# EAGLE board rpicam_rev2 (EAGLE 7.1.0)
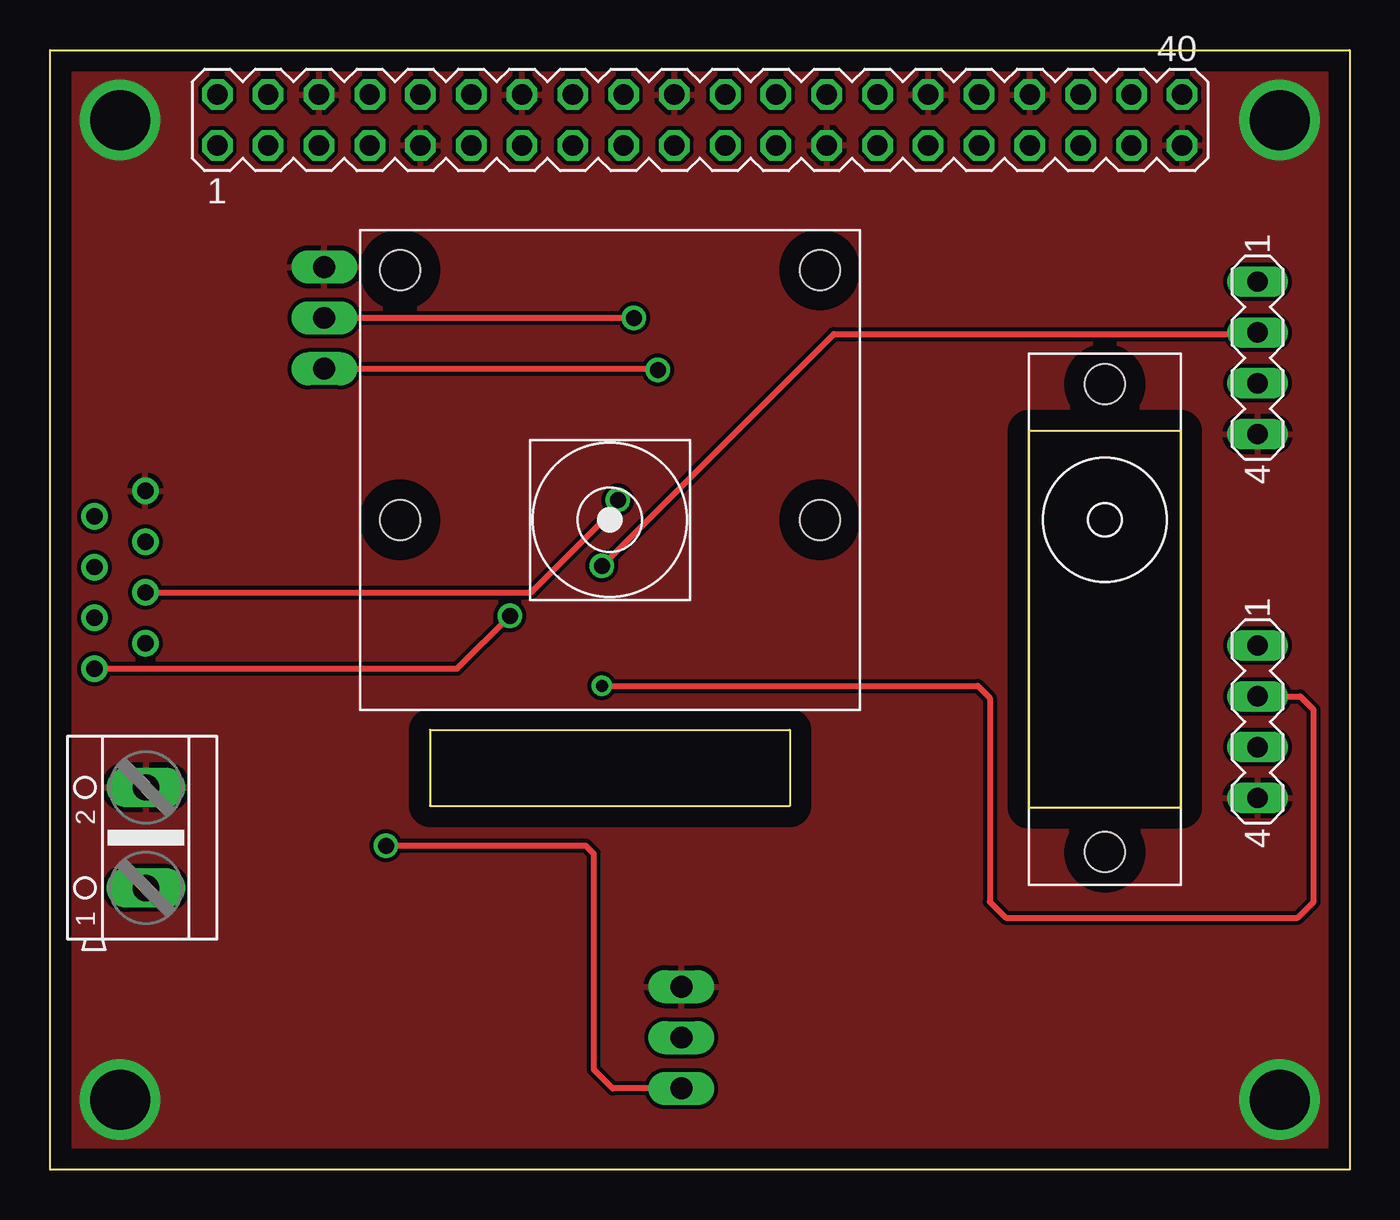
[diagram p0: board, top side]
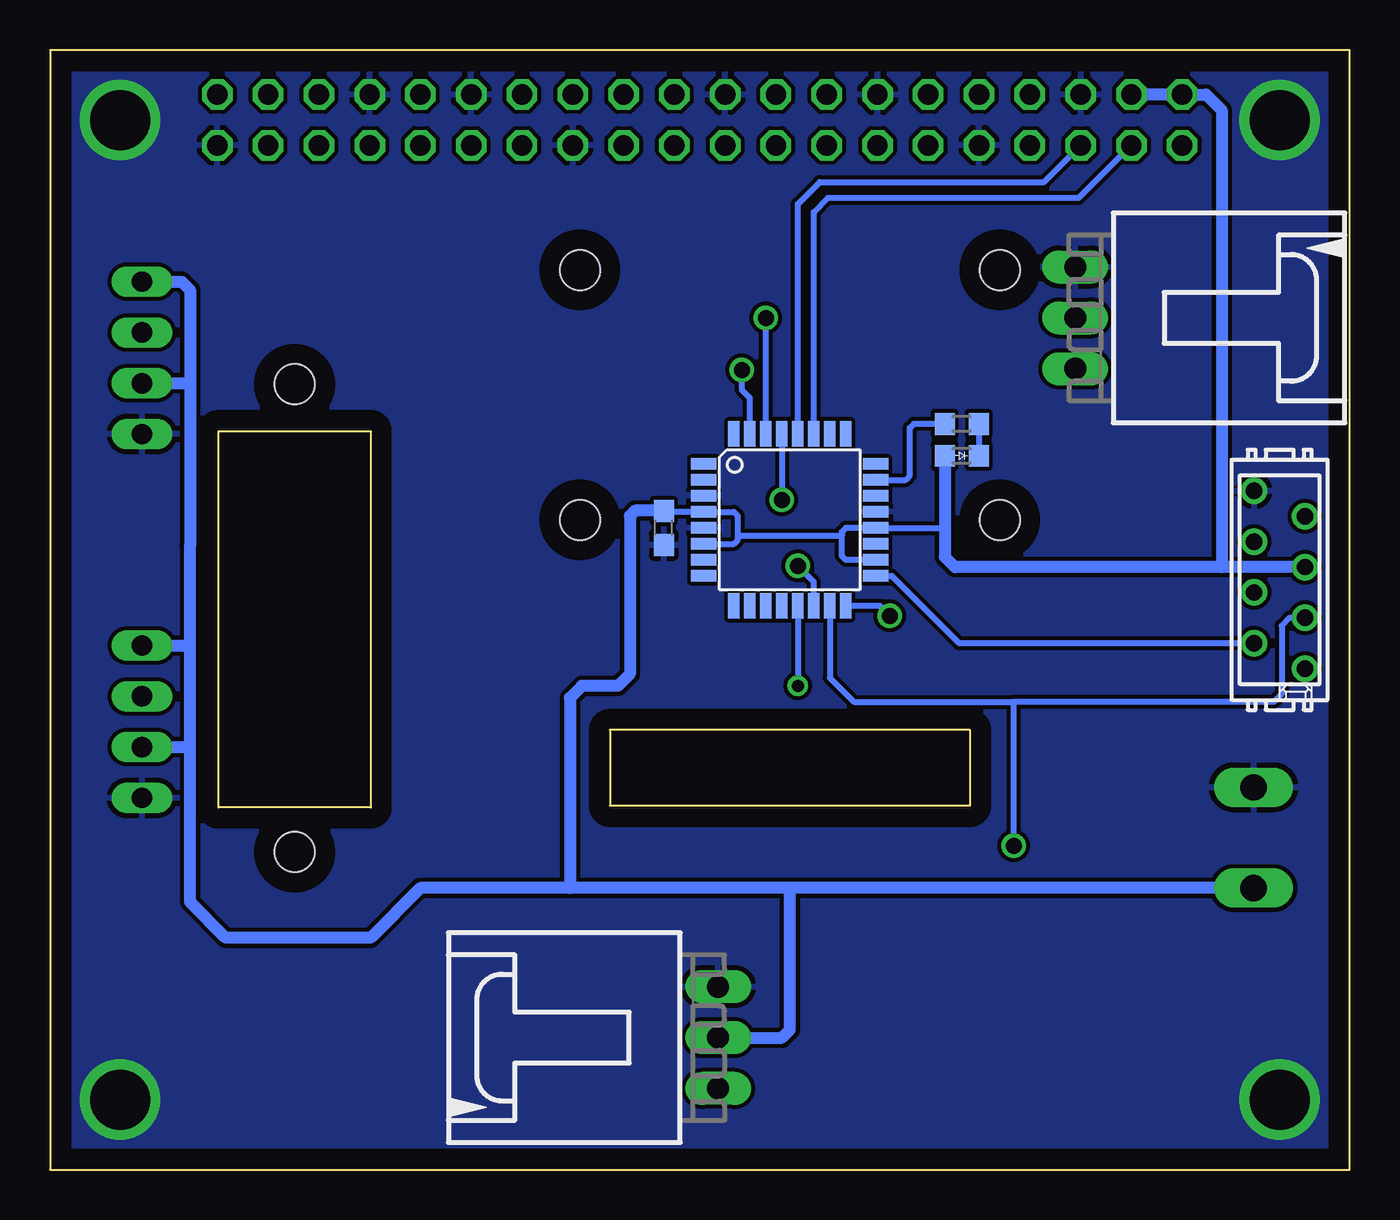
[diagram p1: board, bottom side, seen from below]

Size 65 x 56 mm. Coordinates in mm from the lower left corner, seen from the top.
Outline: 0,56 65,56 65,0 0,0 0,56
Outline: 19,22 19,18.2 37,18.2 37,22 19,22
Copper layers (1*16): Top 0.035mm / dielectric 1.5mm / Bottom 0.035mm
Design rules "default": minimum track width 10mil, minimum drill 24mil, track to track 8mil, track to pad 8mil, pad to pad 8mil, via to via 8mil, smd to smd 8mil, copper to edge 40mil, drill to drill 8mil, minimum pad ring 10mil, minimum via ring 8mil, stop-mask expansion 4mil, vias tented up to drill 0mil, thermal gap 10mil

## Footprints (pad centres in the part's own frame; a part is rotated, then mirrored left to right if it is on the bottom)
C0603 = smd 1.1 x 1: 1 -0.85,0; 2 0.85,0
TQFP32-08 = smd 1.27 x 0.559: 1 -4.293,2.8; 2 -4.293,2; 3 -4.293,1.2; 4 -4.293,0.4; 5 -4.293,-0.4; 6 -4.293,-1.2; 7 -4.293,-2; 8 -4.293,-2.8; 17 4.293,-2.8; 18 4.293,-2; 19 4.293,-1.2; 20 4.293,-0.4; 21 4.293,0.4; 22 4.293,1.2; 23 4.293,2; 24 4.293,2.8 | smd 0.559 x 1.27: 9 -2.8,-4.293; 10 -2,-4.293; 11 -1.2,-4.293; 12 -0.4,-4.293; 13 0.4,-4.293; 14 1.2,-4.293; 15 2,-4.293; 16 2.8,-4.293; 25 2.8,4.293; 26 2,4.293; 27 1.2,4.293; 28 0.4,4.293; 29 -0.4,4.293; 30 -1.2,4.293; 31 -2,4.293; 32 -2.8,4.293
MICROMATCH-8 = drill 0.813: 1 4.445,1.27; 2 3.175,-1.27; 3 1.905,1.27; 4 0.635,-1.27; 5 -0.635,1.27; 6 -1.905,-1.27; 7 -3.175,1.27; 8 -4.445,-1.27
R0603 = smd 1 x 1.1: 1 -0.85,0; 2 0.85,0
MA20-2 = drill 1.016 octagon: 1 -24.13,-1.27; 2 -24.13,1.27; 3 -21.59,-1.27; 4 -21.59,1.27; 5 -19.05,-1.27; 6 -19.05,1.27; 7 -16.51,-1.27; 8 -16.51,1.27; 9 -13.97,-1.27; 10 -13.97,1.27; 11 -11.43,-1.27; 12 -11.43,1.27; 13 -8.89,-1.27; 14 -8.89,1.27; 15 -6.35,-1.27; 16 -6.35,1.27; 17 -3.81,-1.27; 18 -3.81,1.27; 19 -1.27,-1.27; 20 -1.27,1.27; 21 1.27,-1.27; 22 1.27,1.27; 23 3.81,-1.27; 24 3.81,1.27; 25 6.35,-1.27; 26 6.35,1.27; 27 8.89,-1.27; 28 8.89,1.27; 29 11.43,-1.27; 30 11.43,1.27; 31 13.97,-1.27; 32 13.97,1.27; 33 16.51,-1.27; 34 16.51,1.27; 35 19.05,-1.27; 36 19.05,1.27; 37 21.59,-1.27; 38 21.59,1.27; 39 24.13,-1.27; 40 24.13,1.27
MA04-1 = drill 1.016 long: 1 -3.81,0; 2 -1.27,0; 3 1.27,0; 4 3.81,0
D0603 = smd 1 x 1.1: 1 -0.85,0; 2 0.85,0
RPICAM = hole 2: -10.5,0; 10.5,0; -10.5,12.5; 10.5,12.5
HS-35HD = hole 2: 0,-16.62; 0,6.78
70553-03 = drill 1.092 long: 1 -2.54,-7.62; 2 0,-7.62; 3 2.54,-7.62
AK500/2 = drill 1.321 long: 1 -2.515,0; 2 2.515,0

## Placement (x,y rotation side)
C1  [C0603]  34.3,32.1 90 bottom
IC1  MEGA8-AI  [TQFP32-08]  28,32.5 0 bottom
ISP  MICROMATCH-8  [MICROMATCH-8]  3.5,29.5 270 bottom
R1  [R0603]  19.4,37.3 0 bottom
SV1  [MA20-2]  32.5,52.5 0 top
SV2  [MA04-1]  60.4,22.4 270 top
SV3  [MA04-1]  60.4,40.6 270 top
U$1  LED0603  [D0603]  19.4,35.7 0 bottom
U$2  [RPICAM]  28,32.5 0 top
U$3  [HS-35HD]  52.76,32.5 0 top
UART  uart  [70553-03]  6.1,42.6 270 bottom
X1  C-GRID-03-70553  [70553-03]  39.2,6.6 90 bottom
X2  [AK500/2]  4.8,16.6 90 top

## Library data of the parts
C1 R1 = rcl
IC1 = atmel
ISP = con-amp-micromatch; MF: FARNELL; MPN: 7-215464-8; OC_FARNELL: 3784642; OC_NEWARK: 26H0301
SV1-SV3 = con-lstb; OC_FARNELL: unknown; OC_NEWARK: unknown
U$1 = wb
U$2 = RaspberryPi
U$3 = servos
UART X1 = con-molex; OC_FARNELL: unknown; OC_NEWARK: unknown
X2 = con-ptr500; OC_FARNELL: unknown; OC_NEWARK: unknown

## Nets
+5V: C1.2 IC1.4 IC1.6 IC1.18 IC1.20 ISP.5 SV1.2 SV1.4 SV2.1 SV2.3 SV3.1 SV3.3 U$1.1 X1.2 X2.1
GND: C1.1 IC1.3 IC1.5 IC1.21 ISP.8 SV1.6 SV1.9 SV1.14 SV1.20 SV1.25 SV1.30 SV1.34 SV1.39 SV2.4 SV3.4 UART.1 X1.3 X2.2
LED1_CTRL: IC1.13 SV2.2
LED2_CTRL: IC1.14 SV3.2
MISO: IC1.16 ISP.1
MOSI/SRV_CTRL: IC1.15 ISP.3 X1.1
N$1: R1.2 U$1.2
N$4: IC1.23 R1.1
RST: IC1.29 ISP.4
RXD: IC1.30 UART.2
SCK: IC1.17 ISP.2
SCL: IC1.28 SV1.5
SDA: IC1.27 SV1.3
TXD: IC1.31 UART.3

## Tracks (layer width: path | path; a pad name or v marks a point on that pad's centre or on a via)
+5V
  Bottom 0.305: IC1.6 30.8,31.3 30.6,31.5 30.6,31.7 | 30.6,31.7 30.6,32.7 30.8,32.9 IC1.4 34.25,32.9 C1.2 | IC1.18 25.2,30.5 25.4,30.7 25.4,31.7 | 25.4,31.7 25.4,31.9 25.2,32.1 IC1.20 20.3,32.1 | 25.4,31.7 30.6,31.7 | 20.3,32.1 20.25,32.1 | 20.25,32.15 20.3,32.1
  Bottom 0.61: U$1.1 20.25,32.15 | SV3.1 58.41,44.41 58,44 58,39.2 | SV3.3 58.13,39.33 58,39.2 | C1.2 35.75,32.95 36,32.7 36,24.8 36.6,24.2 38.4,24.2 39,23.6 39,14.09 | X2.1 28,14.09 | 28,14.09 39,14.09 | 39,14.09 46.48,14.09 48.97,11.6 56.2,11.6 58,13.4 58,21 | ISP.5 6.4,30.14 | 6.4,30.14 19.73,30.14 20.25,30.65 20.25,32.1 | 58,39.2 58,31.2 | 58.01,31.21 58,31.2 | 58,21 58,26 | 58,26 58,31.2 | 6.4,30.14 6.4,53 7.17,53.77 SV1.2 SV1.4 | SV2.1 58.21,26.21 58,26 | SV2.3 58.13,21.13 58,21 | 28,14.09 28,7 28.4,6.6 X1.2
GND  (via drill 3)
  other vias: 61.5,3.5 3.5,52.5 3.5,3.5 61.5,52.5
  pour Bottom: 0,56 65,56 65,0 0,0
  pour Top: 0,56 65,56 65,0 0,0
LED1_CTRL  (via drill 0.6)
  Top 0.305: v27.6,24.2 46.4,24.2 47,23.6 47,13.4 47.8,12.6 62.4,12.6 63.2,13.4 63.2,23 62.53,23.67 SV2.2
  Bottom 0.305: IC1.13 v27.6,24.2
LED2_CTRL  (via drill 0.8)
  Top 0.305: v27.6,30.2 39.2,41.8 60.33,41.8 SV3.2
  Bottom 0.305: IC1.14 26.8,29.4 v27.6,30.2
MISO  (via drill 0.8)
  Top 0.305: 22.75,27.45 v23,27.7 20.36,25.05 ISP.1
  Bottom 0.305: v23,27.7 23.51,28.21 IC1.16
MOSI/SRV_CTRL  (via drill 0.8)
  Top 0.305: v16.8,16.2 26.8,16.2 27.2,15.8 27.2,5 28,4.2 28.14,4.06 X1.1
  Bottom 0.305: IC1.15 26,24.6 24.8,23.4 16.8,23.4 | ISP.3 3,27.59 3.4,27.2 3.4,23.8 3.8,23.4 16.8,23.4 | v16.8,16.2 16.8,23.4
N$1
  Bottom 0.305: R1.2 U$1.2
N$4
  Bottom 0.305: R1.1 21.8,37.3 22,37.1 22,34.7 22.2,34.5 IC1.23
RST  (via drill 0.8)
  Top 0.305: ISP.4 24.07,28.86 28.4,33.2 v28.4,33.5
  Bottom 0.305: IC1.29 v28.4,33.5
RXD  (via drill 0.8)
  Top 0.305: v29.2,42.6 UART.2
  Bottom 0.305: IC1.30 v29.2,42.6
SCK
  Bottom 0.305: IC1.17 22.9,29.7 19.52,26.32 ISP.2
SCL
  Bottom 0.305: IC1.28 27.6,48.3 26.5,49.4 15.28,49.4 SV1.5
SDA
  Bottom 0.305: IC1.27 26.8,47.9 26.1,48.6 13.54,48.6 SV1.3
TXD  (via drill 0.8)
  Top 0.305: UART.3 30.34,40.06 v30.4,40
  Bottom 0.305: IC1.31 30,38.6 30.4,39 v30.4,40